# Altium PCB EFR32xG22_ESL-Node_Ref-Des.PcbDoc (part 2 of 3)
Units mm, origin at the board's own origin, x right, y up, seen from the top; angles counter-clockwise.
Board outline 101.83 x 52.07 mm, 2 copper layers (Top, Bottom), stack 0.78 mm thick; 179 components, 91 nets, 473 pads, 1291 vias.
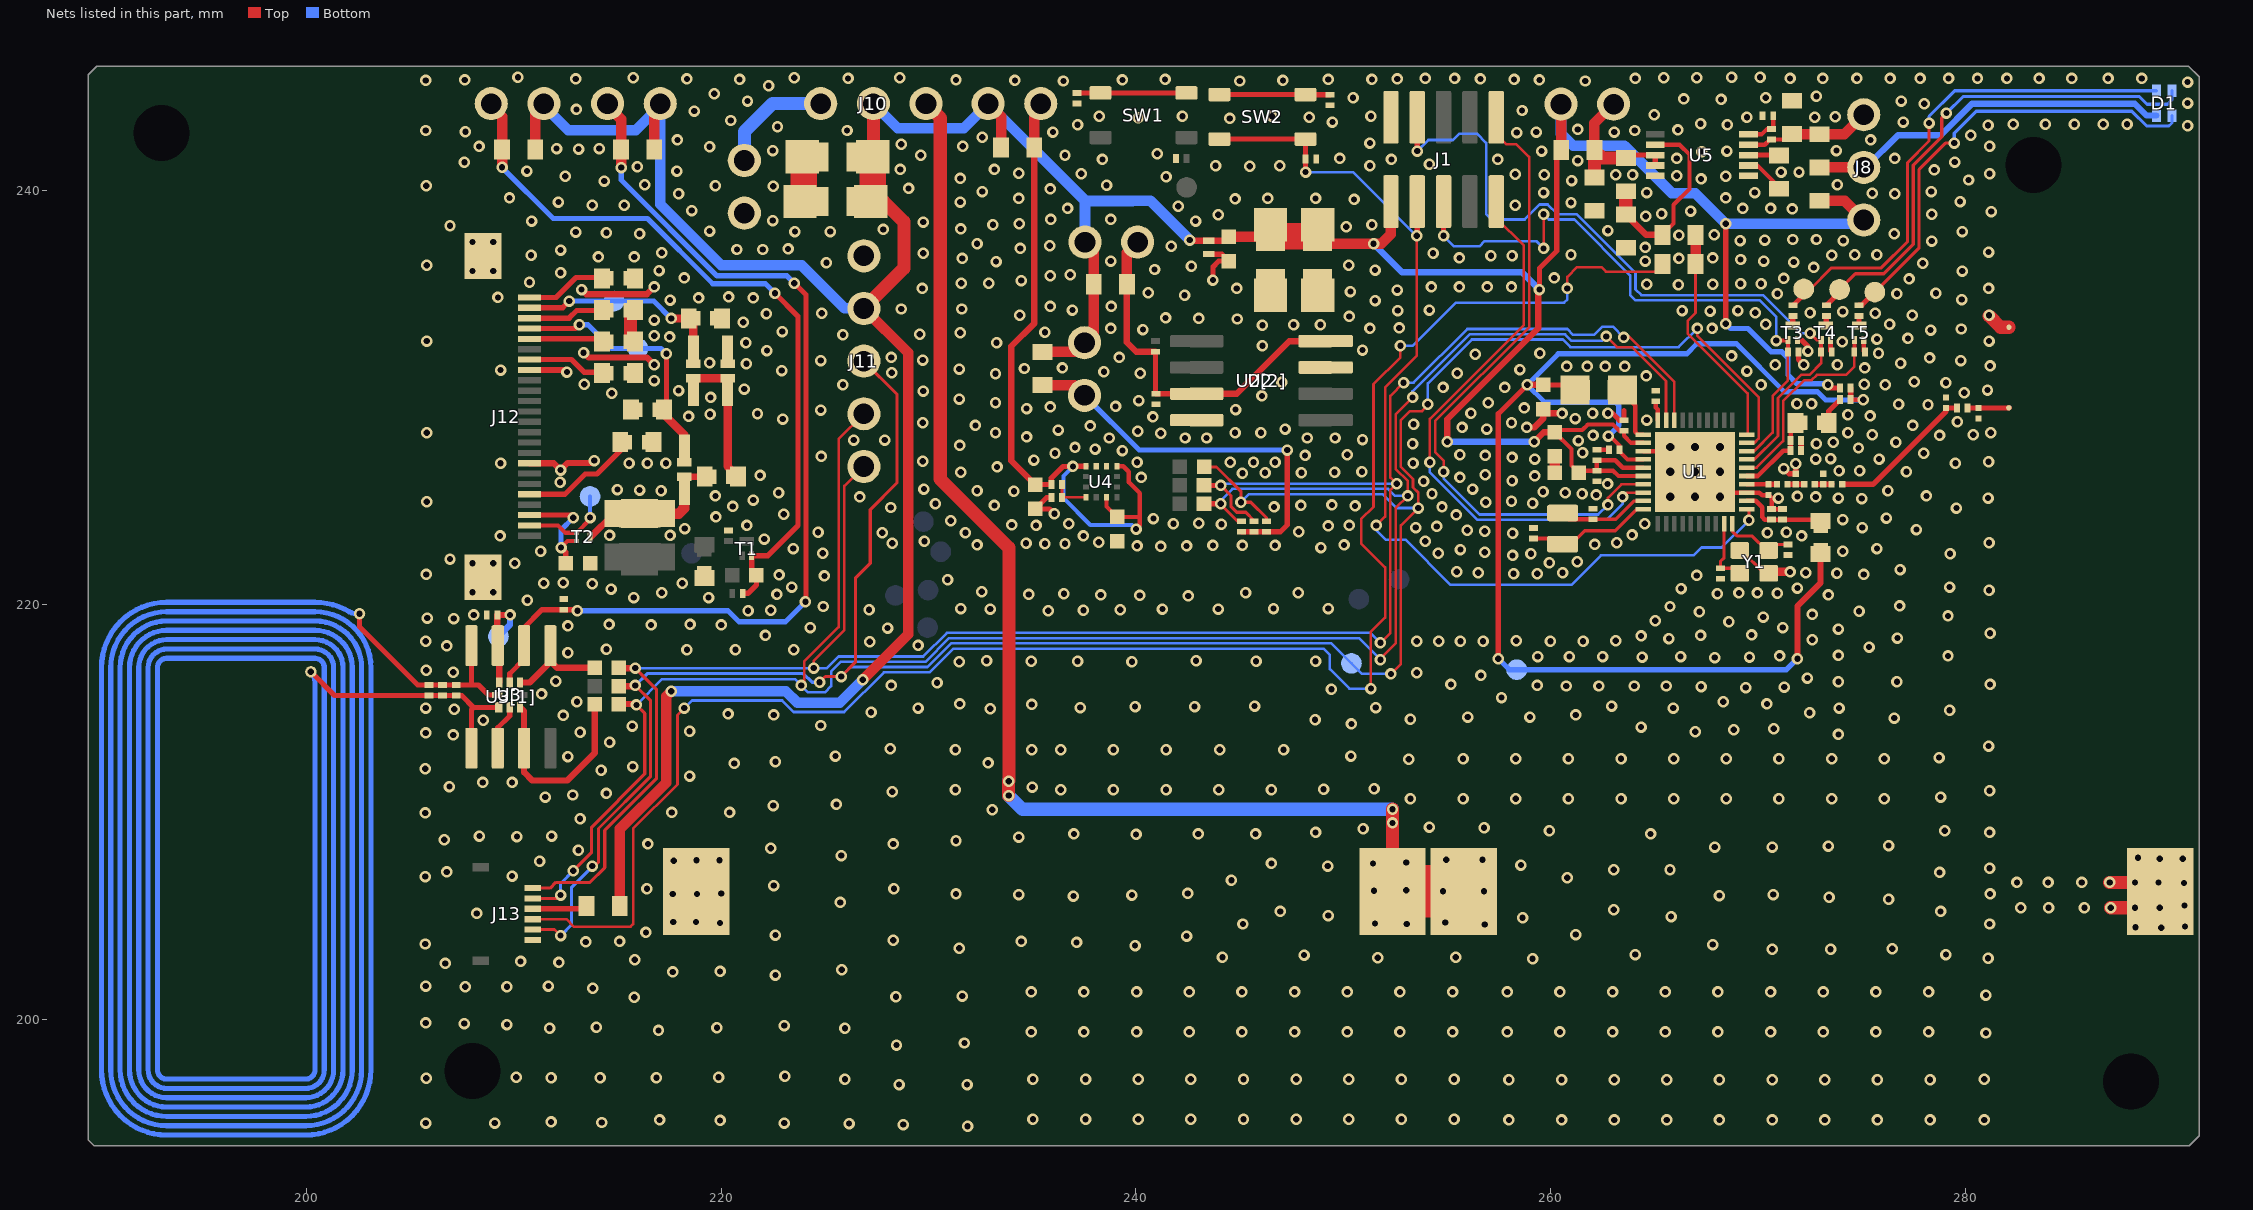
[diagram p2: the nets of this part, all layers, seen from the top]

## Via types
v1: diameter 0.554/0.554 (per signal layer), hole 0.3, Top to Bottom, tented both sides, 1282 vias
v2: diameter 0.65, hole 0.4, Top to Bottom, 9 vias

## Nets (pads, with @x,y where several pads share a name; then routed paths per layer and width w, separated by ;. In a path a pad name is that pad's centre, name@x,y a point inside that pad or via, vN(x,y) a via of type N, cw(c..) or ccw(c..) an arc to the next point about the centre after c; other vN are vias at no path point) (continued)
GND: "BLE ANT.2" BATT1.2 BATT2.2 C1.2 C2.1 C3.2 C4.1 C5.2 C6.1 C7.1 C8.2 C9.1 C10.1 C11.2 C12.2 C13.2 C14.2 C15.2 C16.2 C17.2 C19.1 C20.2 C21.1 C21[2].1 C22.1 C22[2].1 C23.1 C24.1 C24[2].1 C25.1 C25[2].1 C26.1 C27.1 C28.1 C29.1 C32.1 C33.1 C35.2 C35[2].2 C36.2 C36[2].2 C37.2 C37[2].2 C38.2 C38[2].2 C39.2 C39[2].2 C40.2 C40[2].2 C41.2 C41[2].2 C43.2 C43[2].2 CM1.2 CM2.2 CM3.2 CM4.2 D2.A D5.C D5[2].C J1.2 J7.1 J11.1 J12.8 J12.17 J13.1 LM3.1 R5.2 R6.2 R21.1 R27.1 R28.1 R29.1 R32.1 R38.1 R39.1 R41.2 T3.S T4.S T5.S U1.13 U1.33 U1.EGP U2.4 U2[2].4 U3.2 U3[1].2 U4.8 U4.9 U5.5 U5.6 Y1.2 Y1.4 | length 46.8
  Top w0.127: Y1.4@269.099,222.641 Y1.4@269.179,222.641 ; Y1.2@270.329,221.491 Y1.2@270.549,221.491
  Top w0.152: C40[2].2@215.621,235.737 C40.2@215.837,235.737 ; C41.2@215.633,229.413 C41[2].2@215.848,229.413 ; C35[2].2@216.51,227.838 C35.2@216.725,227.838 ; C43[2].2@219.812,233.807 C43.2@220.028,233.807 ; Y1.4@269.179,222.641 Y1.2@270.329,221.491
  Top w0.203: C3.2@262.23,227.477 C3.2@262.23,227.477 C8.2@262.813,227.476 ; U1.33@264.47,227.407 U1.EGP@265.252,227.407
  Top w0.22: U1.EGP@268.77,225.407 U1.13@269.47,225.407 270.071,225.407 270.205,225.273 270.486,225.273 CM1.2@270.51,225.297 270.662,225.145 C10.1@270.662,224.613 C11.2@271.196,224.613 ; T4.S@273.504,232.771 273.504,232.237 R27.1@273.559,232.181 ; T5.S@275.104,232.771 275.104,232.238 R28.1@275.16,232.181
  Top w0.254: U3[1].2@209.212,213.076 209.212,214.063 209.788,214.64 U3.2@209.788,215.046 ; R32.1@235.918,225.167 235.693,225.167 C26.1@235.145,224.619 235.832,224.619 v1(236.068,224.384) ; U2[2].4@242.465,228.905 U2.4@243.389,228.905 ; D2.A@243.51,236.911 244.139,236.911 C23.1@244.475,236.575 243.992,236.575 243.713,236.296 v1(243.713,235.661) ; v1(262.763,229.235) 262.98,229.235 263.316,228.899 C1.2@263.538,228.899 263.538,229.362 ; v1(271.247,226.568) 271.5,226.315 CM2.2@271.831,226.315 v1(271.831,226.797) ; T3.S@271.907,232.766 272.096,232.766 272.415,232.446 v1(272.415,232.232) ; R29.1@271.959,232.181 271.959,231.825 v1(272.212,231.572) ; C12.2@272.086,227.432 C13.2@272.086,227.914
  Top w0.305: J12.8@210.746,226.823 211.911,226.823 v1(212.242,226.492) 212.59,226.84 213.752,226.84 v1(213.863,226.951) ; J12.17@210.746,231.323 212.446,231.323 v1(212.546,231.223) ; v1(213.258,235.204) 213.487,234.975 216.408,234.975 v1(216.764,235.331) ; v1(213.355,232.158) 213.586,231.927 216.408,231.927 v1(216.764,231.572) ; D5[2].C@220.299,231.626 D5.C@220.299,232.351 ; v1(258.851,228.549) 259.207,228.549 259.639,228.981 C7.1@259.639,229.431 259.841,229.229 v1(260.553,229.229) ; U1.EGP@265.252,227.407 265.452,227.607 v2(265.77,227.607) ; Y1.2@270.549,221.491 Y1.2@270.642,221.583
  Top w0.406: Y1.2@270.642,221.583 v1(271.551,221.583)
  Top w0.508: C4.1@260.197,226.365 C2.1@260.198,227.151
  Top w0.635: C39[2].2@215.621,234.213 215.621,232.905 C38.2@215.837,232.689 ; C21.1@223.977,241.122 C21[2].1@224.46,241.605 ; v1@281.153,233.934 281.703,233.384 282.108,233.384 ; v1(286.969,206.604) v1(288.188,206.604) ; v1(287.02,205.384) v1(288.188,205.384)
  Top w1.27: C21.1@223.977,241.122 223.977,239.827 C22.1@224.358,239.446
  other v1: 231.877,194.843 228.778,194.92 226.162,194.97 205.74,194.996 209.067,194.996 223.037,194.996 214.224,195.021 211.785,195.047 219.939,195.123 217.018,195.148 257.988,195.148 260.528,195.148 263.068,195.148 265.608,195.148 268.148,195.148 270.688,195.148 273.228,195.148 275.768,195.148 278.308,195.148 280.924,195.148 235.026,195.174 237.566,195.174 240.106,195.174 242.646,195.174 245.186,195.174 247.726,195.174 250.266,195.174 252.806,195.174 255.346,195.174 228.575,196.85 231.851,196.85 257.988,197.079 260.528,197.079 263.068,197.079 265.608,197.079 268.148,197.079 270.688,197.079 273.228,197.079 275.768,197.079 278.308,197.079 225.958,197.104 235.026,197.104 237.566,197.104 240.106,197.104 242.646,197.104 245.186,197.104 247.726,197.104 250.266,197.104 252.806,197.104 255.346,197.104 280.924,197.104 205.765,197.155 211.785,197.18 214.147,197.18 216.865,197.18 210.109,197.206 219.862,197.206 223.063,197.256 228.448,198.755 231.724,198.857 281,199.339 234.95,199.39 237.49,199.39 240.03,199.39 242.57,199.39 245.11,199.39 247.65,199.39 250.19,199.39 252.73,199.39 255.27,199.39 257.912,199.39 260.452,199.39 262.992,199.39 265.532,199.39 268.072,199.39 270.612,199.39 273.152,199.39 275.692,199.39 278.232,199.39 216.967,199.466 211.709,199.568 225.958,199.568 219.786,199.593 213.97,199.619 223.037,199.695 209.652,199.746 207.594,199.796 205.74,199.822 215.798,201.066 228.422,201.092 231.623,201.117 281,201.168 234.95,201.32 237.49,201.32 240.03,201.32 242.57,201.32 245.11,201.32 247.65,201.32 250.19,201.32 252.73,201.32 255.27,201.32 257.912,201.32 260.452,201.32 262.992,201.32 265.532,201.32 268.072,201.32 270.612,201.32 273.152,201.32 275.692,201.32 278.232,201.32 213.792,201.498 207.645,201.574 209.652,201.574 205.74,201.6 211.658,201.6 222.606,202.133 217.653,202.286 219.939,202.311 225.806,202.387 206.68,202.692 212.166,202.743 210.312,202.794 215.824,202.87 259.131,202.921 281.102,202.946 251.663,202.971 244.17,202.997 255.422,202.997 248.107,203.098 264.084,203.124 279.07,203.124 270.688,203.378 273.507,203.378 276.479,203.403 231.47,203.429 239.954,203.556 267.818,203.606 205.715,203.632 237.134,203.708 213.462,203.733 215.087,203.759 234.467,203.759 228.295,203.81 242.443,204.013 222.606,204.064 261.214,204.089 216.357,204.191 289.458,204.419 288.214,204.445 290.601,204.47 245.161,204.597 281.178,204.597 219.939,204.648 217.678,204.699 218.77,204.699 258.648,204.902 265.811,204.953 249.276,205.003 208.204,205.105 246.964,205.207 278.816,205.207 263.042,205.283 282.677,205.384 284.023,205.384 285.75,205.384 289.382,205.384 290.576,205.486 225.73,205.638 276.301,205.791 273.431,205.892 236.982,205.943 268.148,205.969 239.801,205.994 234.34,206.019 270.739,206.019 217.653,206.045 218.821,206.045 231.318,206.045 281.203,206.045 219.989,206.07 242.494,206.07 216.408,206.299 228.321,206.299 222.529,206.451 290.551,206.578 282.499,206.604 283.997,206.604 285.623,206.604 289.331,206.604 244.602,206.705 260.807,206.832 205.715,206.883 209.906,206.908 278.765,207.086 206.756,207.112 263.042,207.213 265.76,207.213 281.178,207.289 249.25,207.391 258.572,207.442 246.532,207.518 211.226,207.62 217.703,207.645 218.796,207.67 219.913,207.67 289.382,207.747 290.5,207.747 288.341,207.797 225.781,207.899 213.106,208.153 222.377,208.255 267.919,208.305 270.688,208.305 273.406,208.356 276.301,208.382 216.459,208.458 228.295,208.458 231.318,208.61 206.629,208.661 234.34,208.788 210.134,208.813 208.331,208.839 211.811,208.839 240.005,208.915 237.007,208.94 243.002,208.94 245.77,208.94 264.82,208.94 248.666,209.017 281.178,209.017 259.944,209.093 279.019,209.093 250.952,209.194 256.794,209.245 254.152,209.271 213.182,209.677 205.715,209.956 217.602,209.982 220.396,209.982 233.07,210.109 222.504,210.312 225.552,210.363 253.238,210.642 255.778,210.642 258.318,210.642 260.858,210.642 263.398,210.642 265.938,210.642 268.478,210.642 271.018,210.642 273.558,210.642 276.098,210.642 211.506,210.718 278.816,210.718 212.827,210.82 214.452,210.896 228.244,210.972 281.178,211.023 231.292,211.074 236.372,211.074 238.912,211.074 241.452,211.074 243.992,211.074 246.532,211.074 249.047,211.099 251.485,211.125 235.001,211.201 206.883,211.226 208.483,211.43 209.906,211.43 218.465,211.734 214.198,212.014 205.715,212.09 215.722,212.192 220.624,212.344 232.867,212.369 222.606,212.42 253.162,212.547 255.778,212.573 258.318,212.573 260.858,212.573 263.398,212.573 265.938,212.573 268.478,212.573 271.018,212.573 273.558,212.573 276.098,212.573 278.74,212.623 212.598,212.674 225.501,212.7 250.368,212.7 231.292,213.004 234.975,213.004 236.372,213.004 238.912,213.004 241.452,213.004 244.043,213.004 247.117,213.004 228.143,213.055 281.127,213.182 214.605,213.36 207.061,213.716 273.888,213.741 205.74,213.817 213.182,213.843 266.979,213.868 218.465,213.893 268.834,213.97 270.764,214.02 264.363,214.097 215.697,214.147 224.79,214.173 250.393,214.249 208.509,214.427 248.641,214.452 253.238,214.478 276.581,214.528 256.007,214.579 259.004,214.579 212.369,214.655 222.529,214.681 261.214,214.681 220.32,214.732 272.491,214.782 227.219,214.807 279.248,214.909 207.112,214.96 232.969,214.986 205.74,215.011 229.489,215.011 265.913,215.011 273.914,215.011 237.312,215.036 251.562,215.036 239.954,215.087 242.824,215.087 245.72,215.113 262.941,215.113 234.975,215.189 231.496,215.214 270.434,215.214 213.03,215.316 268.326,215.316 257.632,215.519 211.328,215.697 249.428,215.925 269.418,216.002 271.272,216.027 267.259,216.052 260.756,216.078 262.331,216.078 264.033,216.078 265.582,216.078 228.194,216.103 259.359,216.103 255.194,216.154 281.203,216.154 230.403,216.23 273.888,216.281 276.708,216.281 212.014,216.306 272.39,216.459 256.642,216.586 253.543,216.713 207.061,216.738 205.765,216.84 231.47,217.246 239.801,217.246 234.95,217.272 237.185,217.272 245.796,217.272 248.666,217.272 232.791,217.297 242.9,217.297 267.919,217.449 264.414,217.475 269.596,217.475 259.385,217.5 260.909,217.5 262.509,217.5 266.268,217.5 271.043,217.526 279.171,217.526 273.888,217.551 212.598,217.678 218.338,217.83 220.675,217.83 223.495,217.83 214.452,217.856 275.361,217.957 206.756,218.008 229.489,218.034 227.152,218.211 205.74,218.237 253.543,218.237 254.61,218.237 255.651,218.237 256.743,218.237 259.994,218.237 261.569,218.237 258.343,218.262 263.144,218.262 272.618,218.313 265.709,218.364 276.733,218.389 264.363,218.491 222.123,218.516 267.233,218.516 269.697,218.542 281.203,218.618 273.888,218.821 228.016,218.872 224.282,218.897 271.196,218.897 212.598,218.973 216.611,219.024 219.989,219.024 214.579,219.05 218.491,219.05 268.605,219.177 265.049,219.227 207.086,219.329 205.816,219.354 270.256,219.405 279.171,219.456 208.051,219.507 272.618,219.532 267.183,219.659 274.879,219.685 221.285,219.71 235.763,219.71 222.377,219.735 237.465,219.735 227.127,219.761 239.243,219.761 232.969,219.786 241.275,219.786 243.967,219.786 231.546,219.812 246.634,219.812 249.276,219.812 224.917,219.913 265.76,219.913 276.835,219.939 210.642,220.218 215.773,220.345 219.38,220.345 242.519,220.421 240.182,220.447 238.303,220.472 273.406,220.472 222.682,220.497 234.823,220.497 236.525,220.523 268.046,220.523 270.942,220.548 217.119,220.574 245.288,220.574 247.828,220.574 269.088,220.567 269.977,220.567 232.562,220.624 281.153,220.701 214.681,220.751 266.294,220.777 271.907,220.802 223.393,220.853 279.248,220.853 213.766,221.005 211.43,221.031 218.11,221.031 212.369,221.056 230.911,221.209 224.968,221.386 267.056,221.412 222.783,221.437 205.765,221.463 275.107,221.463 258.216,221.488 259.359,221.488 273.812,221.513 256.515,221.539 260.579,221.539 272.313,221.539 255.473,221.59 276.86,221.691 210.033,221.996 259.944,222.021 261.29,222.072 206.908,222.199 258.166,222.377 259.055,222.453 279.273,222.453 224.892,222.479 254.584,222.479 256.819,222.529 211.277,222.58 274.091,222.58 255.651,222.656 223.469,222.707 275.742,222.707 248.92,222.758 241.198,222.809 240.055,222.834 242.443,222.834 243.713,222.86 245.135,222.86 246.71,222.86 232.334,222.885 250.038,222.885 262.128,222.91 235.61,222.936 236.576,222.936 228.244,222.961 234.696,222.961 263.195,222.987 281.153,222.987 238.201,223.012 229.794,223.063 253.949,223.063 222.072,223.164 209.321,223.317 237.465,223.317 272.11,223.317 214.605,223.342 217.526,223.342 263.931,223.368 258.166,223.444 227.762,223.469 231.775,223.469 270.459,223.469 224.663,223.495 271.374,223.495 247.853,223.52 256.819,223.545 255.981,223.596 277.647,223.622 218.237,223.672 253.492,223.723 275.031,223.723 254.508,223.774 249.276,223.799 221.234,223.825 235.179,223.825 250.292,223.825 234.01,223.85 244.119,223.876 236.753,223.901 241.808,223.901 264.541,223.901 243.027,223.926 231.064,224.053 274.091,224.104 240.843,224.155 276.2,224.18 219.735,224.231 255.448,224.333 223.012,224.358 279.578,224.663 228.168,224.688 246.659,224.714 254.762,224.714 220.548,224.739 250.571,224.765 233.172,224.79 247.955,224.79 249.453,224.815 230.327,224.866 259.131,224.892 256.87,224.942 205.791,224.968 258.115,224.993 221.539,225.044 275.006,225.12 270.993,225.146 273.888,225.146 281.102,225.146 226.67,225.196 272.796,225.196 271.907,225.222 219.71,225.247 278.13,225.247 262.204,225.298 254.279,225.349 261.518,225.349 222.758,225.4 260.706,225.4 259.639,225.45 234.112,225.476 217.094,225.501 232.334,225.501 276.276,225.501 216.052,225.527 214.986,225.552 229.768,225.577 256.235,225.577 262.75,225.824 212.217,225.908 253.873,225.958 258.14,225.984 240.259,226.136 255.626,226.136 259.232,226.212 221.869,226.238 256.845,226.263 245.135,226.339 246.228,226.365 247.98,226.365 231.546,226.39 249.58,226.39 250.901,226.416 277.165,226.416 273.914,226.466 274.904,226.466 233.299,226.644 209.347,226.822 215.544,226.822 216.433,226.822 217.322,226.822 253.365,226.822 279.527,226.822 240.055,226.873 244.551,226.873 245.669,226.873 246.71,226.873 281.127,226.898 229.718,226.924 235.077,226.974 259.232,227.025 272.796,227.025 275.844,227.025 273.507,227.051 258.14,227.101 224.815,227.152 248.158,227.203 256.845,227.203 250.19,227.228 255.626,227.228 236.093,227.305 278.003,227.305 261.544,227.33 239.344,227.432 238.023,227.508 274.853,227.559 237.058,227.584 231.496,227.686 253.34,227.762 272.821,227.762 273.634,227.838 276.657,227.838 261.341,227.914 226.383,227.94 227.881,227.94 250.927,227.965 238.709,228.041 242.367,228.041 243.408,228.041 248.26,228.041 249.606,228.041 234.721,228.092 262.052,228.168 278.765,228.168 275.514,228.194 280.391,228.194 241.198,228.27 205.791,228.295 233.223,228.295 244.78,228.295 246.024,228.295 274.345,228.295 281.229,228.295 240.081,228.371 236.245,228.422 247.193,228.473 256.921,228.473 255.727,228.549 237.795,228.625 232.258,228.651 277.47,228.651 253.39,228.702 229.718,228.778 258.115,228.778 279.629,228.829 264.643,228.905 222.961,228.956 261.188,228.981 240.817,229.057 218.415,229.083 275.412,229.108 274.345,229.159 219.456,229.184 221.742,229.21 256.159,229.235 262.026,229.235 224.79,229.387 244.805,229.413 234.721,229.464 258.724,229.489 235.864,229.54 239.014,229.565 278.206,229.641 276.784,229.667 271.882,229.692 272.593,229.692 233.223,229.743 256.997,229.743 240.132,229.845 231.47,229.921 219.481,229.997 246.075,230.073 214.706,230.2 279.959,230.226 229.743,230.302 217.932,230.327 281.076,230.353 221.107,230.403 254.813,230.48 257.785,230.48 225.862,230.609 270.154,230.607 276.149,230.607 213.385,230.632 275.133,230.632 279.07,230.708 247.04,230.734 277.546,230.759 216.764,230.81 264.617,231.038 233.223,231.14 240.208,231.165 255.499,231.165 228.219,231.191 238.455,231.242 269.469,231.267 222.91,231.292 209.347,231.318 258.521,231.343 231.47,231.369 234.62,231.394 236.449,231.419 275.158,231.419 260.782,231.496 261.772,231.496 262.636,231.496 263.576,231.496 281.203,231.521 270.84,231.572 273.837,231.572 221.209,231.623 276.885,231.648 219.431,231.673 224.79,231.775 279.781,231.775 229.718,231.8 278.282,231.902 228.194,231.927 239.192,231.927 268.732,232.004 256.362,232.08 259.486,232.131 275.819,232.131 222.199,232.258 250.927,232.283 246.101,232.486 221.183,232.639 233.274,232.639 274.066,232.689 205.791,232.715 281.153,232.715 275.742,232.816 277.241,232.842 217.5,232.918 216.764,232.969 225.862,233.02 229.565,233.045 231.521,233.121 235.61,233.147 222.936,233.172 278.333,233.248 240.335,233.274 279.806,233.299 238.785,233.324 251.282,233.324 267.792,233.324 252.705,233.35 246.101,233.477 247.599,233.502 248.895,233.502 270.383,233.528 276.352,233.528 221.056,233.629 216.764,233.731 244.881,233.782 243.027,233.807 241.427,233.832 250.292,233.909 234.391,233.959 277.444,233.959 281.153,233.959 222.174,234.036 224.841,234.061 275.666,234.061 269.875,234.086 272.517,234.086 274.091,234.137 267.691,234.163 252.628,234.188 266.344,234.188 269.037,234.188 236.931,234.213 254.152,234.213 228.676,234.264 231.597,234.264 235.864,234.391 238.811,234.391 251.536,234.671 217.526,234.696 279.832,234.721 218.897,234.798 221.539,234.798 209.22,234.823 220.345,234.848 242.341,234.925 270.942,235.001 276.708,235.001 278.587,235.026 240.589,235.052 250.342,235.102 252.603,235.179 229.692,235.255 244.856,235.255 281.127,235.255 254.254,235.331 255.6,235.331 256.946,235.331 258.115,235.331 266.167,235.433 264.643,235.458 267.818,235.458 269.164,235.483 270.154,235.483 231.572,235.509 232.893,235.509 210.744,235.56 234.467,235.636 277.292,235.712 271.247,235.737 218.211,235.763 260.172,235.763 235.864,235.864 236.83,235.915 212.242,236.017 279.857,236.093 216.992,236.118 251.536,236.144 240.894,236.169 272.694,236.271 242.672,236.322 205.791,236.372 250.266,236.372 277.952,236.474 225.069,236.499 271.729,236.525 233.248,236.55 238.785,236.576 264.566,236.576 270.281,236.576 269.164,236.652 231.623,236.703 266.192,236.703 255.6,236.728 267.818,236.728 214.071,236.779 215.798,236.779 257.124,236.83 258.14,236.83 210.82,236.855 273.558,236.855 260.985,236.88 274.676,236.88 275.742,236.88 229.743,236.957 254.33,236.957 217.119,236.982 281.127,237.007 212.242,237.109 220.751,237.134 221.996,237.134 223.215,237.16 234.417,237.185 264.566,237.236 241.706,237.287 235.839,237.312 232.334,237.414 278.384,237.541 269.138,237.566 274.117,237.566 270.332,237.592 271.678,237.617 272.821,237.617 266.192,237.82 267.894,237.846 216.052,237.896 276.581,237.896 214.452,237.947 212.979,237.973 223.545,237.998 225.247,237.998 279.857,237.998 219.431,238.023 262.763,238.049 227.805,238.1 231.546,238.125 250.139,238.227 206.908,238.277 233.096,238.328 251.384,238.328 234.366,238.379 229.743,238.455 210.845,238.506 242.875,238.506 222.479,238.531 235.89,238.582 238.785,238.582 264.592,238.735 243.967,238.811 278.384,238.836 265.354,238.862 281.254,238.963 266.751,238.989 218.567,239.014 271.653,239.09 236.703,239.116 269.265,239.116 270.612,239.116 242.037,239.217 213.766,239.268 215.316,239.268 258.293,239.268 260.985,239.395 212.141,239.42 231.521,239.42 279.756,239.446 250.52,239.547 244.78,239.573 234.34,239.598 246.355,239.598 248.666,239.598 209.779,239.624 268.453,239.624 217.932,239.827 276.606,239.827 275.514,239.852 259.664,239.878 264.643,239.878 269.85,239.878 232.588,239.928 278.359,239.928 235.864,240.055 229.032,240.081 222.504,240.182 205.765,240.208 219.71,240.208 238.582,240.233 216.306,240.259 273.837,240.259 214.351,240.436 261.01,240.462 280.162,240.487 267.259,240.538 231.521,240.563 241.452,240.64 212.471,240.665 268.453,240.665 266.09,240.69 259.69,240.741 263.144,240.741 263.957,240.741 258.293,240.767 237.363,240.792 281.178,240.792 234.34,240.817 271.12,240.868 271.983,240.868 210.617,240.919 217.856,240.919 278.511,240.97 228.625,240.995 233.172,240.995 215.951,241.122 245.491,241.148 243.84,241.173 246.939,241.173 251.282,241.173 254.152,241.249 207.602,241.343 279.502,241.351 261.315,241.427 238.379,241.478 252.324,241.478 257.454,241.478 249.834,241.529 266.09,241.529 276.606,241.529 229.616,241.681 236.576,241.681 241.021,241.757 267.284,241.859 259.563,241.884 268.503,241.884 222.479,241.91 273.787,241.91 213.114,241.978 212.047,242.004 214.104,242.004 219.431,242.087 208.313,242.105 231.648,242.113 281.178,242.113 228.676,242.214 251.282,242.265 217.881,242.418 275.438,242.418 232.588,242.545 280.264,242.646 258.369,242.773 235.991,242.799 259.309,242.799 263.068,242.799 207.653,242.816 205.74,242.875 226.06,242.875 264.056,242.875 266.141,242.9 261.315,242.926 222.707,243.053 290.728,243.103 281.102,243.129 237.185,243.154 268.529,243.154 282.321,243.18 283.87,243.18 285.267,243.18 286.664,243.18 287.807,243.18 267.233,243.205 249.479,243.281 277.012,243.281 220.447,243.357 244.526,243.459 240.106,243.484 248.361,243.51 269.469,243.51 272.745,243.51 273.736,243.535 238.227,243.561 242.24,243.561 246.558,243.561 251.333,243.561 264.998,243.637 218.694,243.815 258.623,243.84 213.004,243.891 278.028,244.17 290.728,244.196 221.259,244.297 276.911,244.297 268.224,244.373 266.421,244.399 250.469,244.45 270.383,244.45 272.821,244.526 219.659,244.653 222.275,245.034 290.728,245.212 236.499,245.262 245.008,245.262 261.671,245.262 205.74,245.288 234.163,245.288 247.091,245.288 207.62,245.313 231.318,245.313 239.344,245.313 259.461,245.313 220.878,245.339 241.402,245.339 249.276,245.339 251.384,245.339 258.242,245.339 212.979,245.364 218.338,245.364 252.603,245.364 256.616,245.364 226.111,245.389 253.949,245.389 255.372,245.389 264.084,245.389 271.551,245.389 273.126,245.389 274.777,245.389 276.377,245.389 277.825,245.389 279.197,245.389 280.594,245.389 282.016,245.389 283.566,245.389 285.14,245.389 286.893,245.389 288.519,245.389 215.748,245.415 223.52,245.415 228.6,245.415 265.455,245.415 267.056,245.415 210.185,245.44 268.732,245.44 270.104,245.44
  other v2: 265.77,225.207 266.97,225.207 268.17,225.207 265.77,226.407 266.97,226.407 268.17,226.407 266.97,227.607 268.17,227.607
I2C_SCL: J11.4 J13.5 R11.1 R12.1 R15.1 U1.29 | length 108.4
  Top w0.127: v1(223.85,216.103) 223.992,216.245 223.992,217.261 225.654,218.923 225.654,227.99 J11.4@226.873,229.21 ; v1(251.79,217.348) 251.79,217.399 252.527,218.135 252.527,224.663 v1(253.111,225.247) 253.111,225.959 252.527,226.543 252.527,229.184 v1(253.34,229.997) ; v1(262.687,232.943) 263.205,232.425 263.935,232.425 265.57,230.79 U1.29@265.57,228.907
  Top w0.152: J13.5@210.899,205.83 212.078,205.83 v1(212.242,205.994) ; v1(212.852,207.162) 213.741,208.051 213.741,209.271 216.306,211.836 216.306,214.757 v1(215.9,215.163) ; v1(244.094,224.866) 244.094,224.833 244.898,224.029 R15.1@245.085,224.029
  Top w0.254: R11.1@243.281,224.866 v1(244.094,224.866)
  Top w0.305: R12.1@215.055,215.206 215.857,215.206 v1(215.9,215.163)
  Bottom w0.127: v1(215.9,215.163) 217.145,216.408 223.545,216.408 v1(223.85,216.103) 224.18,215.773 224.994,215.773 225.298,216.077 225.298,216.789 225.755,217.246 229.837,217.246 230.98,218.389 250.749,218.389 v1(251.79,217.348) ; v1(244.094,224.866) 244.094,225.027 244.653,225.585 252.162,225.585 252.501,225.247 v1(253.111,225.247) ; v1(253.34,229.997) 253.34,230.292 256.093,233.045 260.706,233.045 261.021,232.73 262.473,232.73 v1(262.687,232.943)
  Bottom w0.152: v1(212.242,205.994) 212.242,206.553 v1(212.852,207.162)
I2C_SDA: J11.5 J13.6 R9.1 R10.1 R14.1 U1.28 | length 106
  Top w0.127: v1(224.46,216.941) 224.46,217.297 225.933,218.77 225.933,225.73 J11.5@226.873,226.67 ; v1(251.79,218.161) 252.273,218.643 252.273,225.527 v1(252.578,225.831) 252.273,226.136 252.273,230.073 v1(252.908,230.708) ; v1(263.525,232.893) 263.725,232.893 263.776,232.943 265.97,230.749 U1.28@265.97,228.907
  Top w0.152: J13.6@210.899,206.33 211.74,206.33 212.014,206.604 213.665,206.604 214.376,207.315 214.376,209.115 216.865,211.605 216.865,215.925 v1(215.849,216.941) ; v1(244.094,225.755) 244.579,225.27 244.579,224.744 244.86,224.462 245.294,224.462 245.694,224.062 R14.1@245.694,224.029
  Top w0.254: R10.1@243.281,225.755 v1(244.094,225.755)
  Top w0.305: R9.1@215.055,216.959 215.072,216.941 v1(215.849,216.941)
  Bottom w0.127: v1(215.849,216.941) v1(224.46,216.941) 225.091,216.941 225.65,217.5 229.732,217.5 230.875,218.643 251.308,218.643 v1(251.79,218.161) ; v1(244.094,225.755) 244.178,225.839 252.57,225.839 v1(252.578,225.831) ; v1(252.908,230.708) 253.397,230.708 255.988,233.299 260.811,233.299 261.09,233.02 262.102,233.02 262.493,233.411 263.007,233.411 v1(263.525,232.893)
LED_B: R28.2 T5.G U1.16 | length 9.6
  Top w0.127: U1.16@269.47,226.607 269.939,226.607 271.221,227.889 271.221,229.819 272.237,230.835 272.596,230.835 272.85,231.089 274.244,231.089 274.65,231.496 R28.2@274.65,232.181
  Top w0.203: R28.2@274.65,232.181 274.654,232.185 T5.G@274.654,232.771
LED_BST_EN: R3.1 R37.1 R38.2 U5.2 | length 9.5
  Top w0.203: U5.2@265.049,242.189 266.221,242.189 266.7,241.71 266.7,240.055 265.936,239.291 265.936,238.389 R3.1@265.392,237.846
  Top w0.305: R38.2@263.627,238.823 264.604,237.846 R3.1@265.392,237.846
  Top w0.635: R38.2@263.627,238.823 R37.1@263.627,239.941
LED_G_DBG_UART_RX: J1.4 R27.2 T4.G U1.17 | length 36.3
  Top w0.127: U1.17@269.47,227.007 269.825,227.007 270.967,228.149 270.967,229.968 272.088,231.089 272.491,231.089 273.049,231.647 R27.2@273.049,232.181
  Top w0.152: v1(272.517,233.096) 272.841,232.771 T4.G@273.054,232.771
  Top w0.203: R27.2@273.049,232.181 273.049,232.767 T4.G@273.054,232.771
  Top w0.254: v1(253.568,241.884) J1.4@253.568,243.513
  Bottom w0.127: v1(253.568,241.884) 254.102,242.418 255.295,242.418 255.6,242.722 256.442,242.722 256.896,242.269 256.896,238.836 257.15,238.582 258.749,238.582 259.47,239.304 259.858,239.304 260.325,238.836 261.253,238.836 264.094,235.996 264.094,235.215 264.374,234.935 270.246,234.935 272.085,233.096 v1(272.517,233.096)
LED_R_DBG_UART_TX: J1.5 R29.2 T3.G U1.18 | length 30.5
  Top w0.127: v1(259.664,237.185) v1(259.664,238.836) ; U1.18@269.47,227.407 269.825,227.407 270.713,228.295 270.713,230.073 271.449,230.809 R29.2@271.449,232.181
  Top w0.203: v1(270.891,232.74) 271.432,232.74 T3.G@271.449,232.757 ; R29.2@271.449,232.181 T3.G@271.449,232.757 ; T3.G@271.457,232.766 T3.G@271.449,232.757
  Top w0.254: v1(254.838,237.795) J1.5@254.838,239.443
  Bottom w0.127: v1(254.838,237.795) 255.346,237.287 256.562,237.287 256.816,237.541 259.309,237.541 v1(259.664,237.185) ; v1(259.664,238.836) 259.918,238.582 261.148,238.582 263.84,235.89 263.84,234.94 264.099,234.681 270.093,234.681 270.891,233.883 v1(270.891,232.74)
NC1: J12.P$5
  other v1: 208,236.1 209,236.1 208,237.5 209,237.5
NC2: J12.P$6
  other v1: 208,220.6 209,220.6 208,222 209,222
"NetBLE ANT_1": "BLE ANT.1" LM3.2 RM1.2 | length 2
  Top w0.254: RM1.2@280.113,229.489 LM3.2@280.645,229.49 LM3.2@280.645,229.49 282.098,229.49 282.105,229.498 ; 282.115,229.49 282.133,229.508
NetC9_2: C9.2 U1.30 | length 0.9
  Top w0.203: C9.2@265.074,229.812 265.074,229.508 265.17,229.412 U1.30@265.17,228.907
NetC10_2: C10.2 C11.1 L2.2 L2[1].2 U1.12 | length 4.3
  Top w0.22: U1.12@269.47,225.007 269.89,225.007 270.205,224.692 270.205,224.231 270.333,224.103 C10.2@270.662,224.103 C11.1@271.196,224.103 272.962,224.103 L2.2@273.025,224.041 ; L2[1].2@272.972,223.748 L2[1].2@273.025,223.8
NetC12_1: C12.1 C13.1 L3.2 L3[2].2 U1.15 | length 4.1
  Top w0.22: U1.15@269.47,226.207 269.997,226.207 271.221,227.432 C12.1@271.576,227.432 C13.1@271.576,227.914 271.576,228.529 L3[2].2@271.818,228.771
  Top w0.254: L3[2].2@271.818,228.771 L3.2@271.856,228.771
NetC14_1: C14.1 U1.9 Y1.1 | length 3.4
  Top w0.152: C14.1@268.249,221.761 268.732,221.761 Y1.1@268.77,221.723 ; C14.1@268.249,221.762 C14.1@268.199,221.762 268.199,222.092 268.37,222.264 U1.9@268.37,223.907 ; Y1.1@268.931,221.736 268.783,221.736 Y1.1@268.77,221.723 ; Y1.1@269.099,221.491 269.002,221.491 Y1.1@268.77,221.723
NetC15_1: C15.1 U1.10 Y1.3 | length 3.5
  Top w0.152: U1.10@268.77,223.907 268.77,223.551 269.011,223.31 269.727,223.31 270.397,222.641 270.625,222.641 270.889,222.905 C15.1@271.45,222.905
NetC16_1: C16.1 U1.39 Y2.1 | length 4.4
  Top w0.152: C16.1@262.052,224.122 262.053,224.123 263.144,224.123 264.028,225.007 U1.39@264.47,225.007
  Top w0.203: Y2.1@260.579,224.422 260.879,224.122 C16.1@262.052,224.122
NetC17_1: C17.1 U1.40 Y2.2 | length 6.4
  Top w0.152: Y2.2@260.579,222.922 260.997,222.922 261.645,223.571 263.119,223.571 264.155,224.607 U1.40@264.47,224.607 U1.40@264.187,224.607
  Top w0.203: C17.1@259.182,223.189 260.312,223.189 Y2.2@260.579,222.922
NetC18_1: C18.1 J3.2 R19.1 R20.2 T1.S | length 35.7
  Top w0.254: R20.2@221.032,220.548 221.285,220.548 221.692,220.955 C18.1@221.692,221.412 221.459,221.645 T1.S@221.459,222.357 222.23,222.357 223.698,223.825 223.698,233.909 v1(222.58,235.026)
  Top w0.508: J3.2@208.897,244.061 209.418,243.54 R19.1@209.418,241.953 209.418,241.102 v1(209.423,241.097)
  Bottom w0.254: v1(209.423,241.097) 211.887,238.633 216.433,238.633 219.583,235.483 222.123,235.483 v1(222.58,235.026)
NetC26_2: C26.2 C27.2 J5.2 R30.1 R31.1 U4.3 U4.7 U4.10 | length 34.3
  Top w0.203: U4.3@238.582,225.179 238.582,224.74 C27.2@239.09,224.232 240.179,224.232 ; U4.7@239.082,226.679 239.386,226.679 239.649,226.416 239.649,225.911 240.18,225.38 240.18,224.231 240.18,223.822 v1(240.005,223.647)
  Top w0.254: C26.2@235.145,225.789 235.158,225.802 R31.1@235.918,225.802 235.918,226.114 236.474,226.67 v1(236.957,226.67) 236.966,226.679 U4.10@237.582,226.679
  Top w0.305: R30.1@235.09,242.062 235.09,233.566 233.985,232.461 233.985,226.95 C26.2@235.145,225.789
  Top w0.508: R30.1@235.09,242.062 235.09,243.853 J5.2@235.407,244.17
  Bottom w0.203: v1(236.957,226.67) 236.502,226.215 236.502,225.144 237.796,223.85 239.801,223.85 v1(240.005,223.647)
NetC28_2: C28.2 J4.1 R33.1 U3.6 U3[1].6 | length 47.4
  Top w0.254: U3.6@209.788,216.246 209.788,216.672 210.482,217.365 U3[1].6@210.482,218.026 210.482,218.889 211.352,219.76 C28.2@212.395,219.76 213.005,219.76 v1(213.055,219.71) ; v1(223.52,235.509) 224.079,234.95 224.079,220.167 v1(224.053,220.142)
  Top w0.508: J4.1@214.511,244.061 215.158,243.413 R33.1@215.158,241.953 215.171,241.94 v1(215.171,241.089)
  Bottom w0.254: v1(213.055,219.71) 220.32,219.71 220.851,219.179 223.091,219.179 v1(224.053,220.142) ; v1@215.186,241.074 v1(215.171,241.089) 215.171,240.482 219.788,235.864 223.164,235.864 v1(223.52,235.509)
NetC29_2: C29.2 TP8.P$1 U3.7 U3[1].7 | length 5.2
  Top w0.305: U3.7@209.288,216.246 209.288,217.95 U3[1].7@209.212,218.026 209.194,218.043 C29.2@209.194,219.507 v1(209.804,219.507)
  Bottom w0.305: TP8.P$1@209.245,218.465 209.804,219.024 v1(209.804,219.507)
NetC30_1: "NFC ANT.PB" C30.1 C31.1 R34.1 U3.8 U3[1].8 | length 10.5
  Top w0.25: C31.1@205.889,216.127 C30.1@206.55,216.127 R34.1@207.21,216.127 207.975,216.127 ; U3[1].8@207.942,218.026 207.942,216.16 207.975,216.127 ; U3.8@209.188,215.646 208.763,215.646 208.282,216.127 207.975,216.127
  Top w0.254: 202.546,219.564 202.546,218.935 205.355,216.127 C31.1@205.889,216.127
NetC30_2: "NFC ANT.PA" C30.2 C31.2 R34.2 U3.1 U3[1].1 | length 11.8
  Top w0.25: 200.196,216.764 201.344,215.617 C31.2@205.889,215.617 C30.2@206.55,215.617 R34.2@207.21,215.617 207.471,215.617 208.042,215.046 ; U3[1].1@207.942,213.076 207.942,214.946 208.042,215.046 ; U3.1@209.253,215.046 208.042,215.046
NetC32_2: C32.2 J6.2 R36.1 R37.2 U5.3 U5.4 | length 7.6
  Top w0.254: R37.2@263.627,241.541 263.774,241.689 U5.3@265.049,241.689 U5.4@265.049,241.189
  Top w0.508: R36.1@262.115,241.935 262.115,243.218 J6.2@263.042,244.145
  Top w0.635: C32.2@262.128,240.601 262.115,240.614 R36.1@262.115,241.935 262.509,241.541 R37.2@263.627,241.541
NetC34_1: C34.1 U5.7 | length 2
  Top w0.203: U5.7@269.549,241.189 269.982,241.189 271.018,240.153 C34.1@271.018,240.068
NetC34_2: C34.2 U5.8 | length 1.5
  Top w0.254: U5.8@269.549,241.689 270.997,241.689 C34.2@271.018,241.668
NetC35[1]_1: C35.1 C35[2].1 J12.5 | length 5.9
  Top w0.254: J12.5@210.746,225.323 212.445,225.323 213.431,226.309 213.994,226.309 215.125,227.44 C35.1@215.125,227.838 C35[2].1@215.34,227.838
NetC37[1]_1: C37.1 C37[2].1 J12.18 | length 4
  Top w0.254: J12.18@210.746,231.823 212.772,231.823 213.378,231.218 214.184,231.218 C37.1@214.236,231.165 C37[2].1@214.451,231.165
NetC38[1]_1: C38.1 C38[2].1 J12.20 | length 3.4
  Top w0.254: J12.20@210.746,232.823 C38.1@214.141,232.823
NetC39[1]_1: C39.1 C39[2].1 J12.22 | length 3.9
  Top w0.254: J12.22@210.746,233.823 212.655,233.823 213.02,234.188 214.211,234.188 C39.1@214.236,234.213 C39[2].1@214.451,234.213
NetC40[1]_1: C40.1 C40[2].1 J12.24 | length 4.2
  Top w0.254: J12.24@210.746,234.823 212.029,234.823 212.994,235.788 214.287,235.788 C40.1@214.236,235.737 C40[2].1@214.451,235.737
NetC41[1]_1: C41.1 C41[2].1 D3.C D3[2].C J12.21 TP10.P$1 | length 12.9
  Top w0.254: J12.21@210.746,233.323 212.968,233.323 v1(213.149,233.504) ; C41.1@217.348,229.565 v1(217.348,232.105)
  Top w0.305: C41[2].1@217.018,229.413 C41.1@217.233,229.413 ; D3[2].C@218.211,226.867 D3.C@218.211,227.592
  Top w0.406: C41.1@217.233,229.375 217.233,229.171 218.211,228.194 D3.C@218.211,227.592
  Bottom w0.254: v1(213.149,233.504) 213.561,233.504 214.704,232.361 TP10.P$1@215.971,232.361 217.092,232.361 v1(217.348,232.105)
NetC42[1]_1: C42.1 C42[2].1 D4.C D4[2].C D5.A D5[2].A | length 7.3
  Top w0.406: D4.C@218.648,230.201 D4[2].C@218.648,230.926 D5[2].A@220.299,230.926 D5.A@220.299,230.201 220.299,226.672 C42.1@220.794,226.176
NetC42[1]_2: C42.2 C42[2].2 D3.A D3[2].A L4.2 L4[2].2 L4[3].2 L4[4].2 T2.D | length 7.6
  Top w0.305: T2.D@213.685,223.266 214.811,224.392 L4[4].2@216.052,224.392 ; D3.A@218.211,225.442 D3[2].A@218.211,226.167 218.22,226.176 C42.2@219.194,226.176
  Top w0.508: L4[4].2@216.052,224.392 217.941,224.392 218.211,224.663 D3.A@218.211,225.442
NetC43[1]_1: C43.1 C43[2].1 D4.A D4[2].A J12.23 TP9.P$1 | length 10.4
  Top w0.254: J12.23@210.746,234.323 212.341,234.322 v1(212.666,234.647)
  Top w0.406: v1(217.576,233.807) C43.1@218.427,233.807 218.648,233.587 D4.A@218.648,232.351 D4[2].A@218.648,231.626
  Bottom w0.254: v1(212.666,234.647) TP9.P$1@214.828,234.647 216.736,234.647 v1(217.576,233.807)
NetCC1_1: CC1.1 CM3.1 LM2.2 | length 0.8
  Top w0.254: LM2.2@272.747,225.806 CM3.1@273.152,225.805 CM3.1@273.152,225.805 CM3.1@273.152,225.805 CC1.1@273.557,225.806
NetCC1_2: CC1.2 CM4.1 RM1.1 | length 7.2
  Top w0.254: CC1.2@274.067,225.806 275.55,225.806 279.07,229.326 CM4.1@279.07,229.488 RM1.1@279.603,229.489 RM1.1@279.603,229.489
NetCM1_1: CM1.1 LM1.1 U1.14 | length 1.4
  Top w0.203: U1.14@269.47,225.807 CM1.1@270.51,225.807
  Top w0.254: CM1.1@270.51,225.807 270.914,225.807 LM1.1@270.915,225.806
NetCM2_1: CM2.1 LM1.2 LM2.1 | length 0.8
  Top w0.254: LM1.2@271.425,225.806 CM2.1@271.831,225.805 CM2.1@271.831,225.805 LM2.1@272.237,225.806 LM2.1@272.237,225.806
NetD1_1: D1.1 R26.2 TP7.P$1 | length 24.9
  Top w0.152: TP7.P$1@272.212,235.229 272.535,235.229 273.551,236.245 275.959,236.245 277.218,237.504 277.218,241.328 278.257,242.367 v1(278.257,243.23)
  Top w0.254: R26.2@271.704,234.443 272.212,234.951 TP7.P$1@272.212,235.229
  Bottom w0.152: v1(278.257,243.23) 278.257,243.554 279.499,244.796 D1.1@289.225,244.796
NetD1_2: D1.2 R24.2 TP5.P$1 | length 24.4
  Top w0.152: TP5.P$1@273.939,235.204 274.701,235.966 276.075,235.966 277.497,237.388 277.497,241.201 278.867,242.57 278.867,243.484 v1(279.095,243.713)
  Top w0.254: R24.2@273.304,234.443 273.939,235.078 TP5.P$1@273.939,235.204
  Bottom w0.152: v1(279.095,243.713) 279.898,244.516 288.401,244.516 288.773,244.145 289.763,244.145 289.975,244.357 D1.2@289.975,244.796
NetD1_3: D1.3 R25.2 TP6.P$1 | length 22.2
  Top w0.152: TP6.P$1@275.641,235.077 277.777,237.213 277.777,240.998 279.044,242.265 v1(279.476,242.265)
  Top w0.254: R25.2@274.879,234.443 275.007,234.443 TP6.P$1@275.641,235.077
  Bottom w0.152: v1(279.476,242.265) 279.476,242.748 280.533,243.805 288.039,243.805 288.751,243.092 289.828,243.092 289.975,243.239 D1.3@289.975,243.596
NetJ9_1: J9.1 R13.2 R14.2 R15.2 R16.1 | length 19.1
  Top w0.254: R15.2@245.085,223.519 R14.2@245.694,223.519 R13.2@246.304,223.519 246.963,223.519 247.294,223.85 v1(247.294,227.457)
  Top w0.508: R16.1@235.483,230.594 237.02,230.594 J9.1@237.515,230.099
  Bottom w0.254: J9.1@237.515,230.099 240.157,227.457 v1(247.294,227.457)
NetJ12_2: J12.2 T2.G TP12.P$1 | length 4.4
  Top w0.203: J12.2@210.746,223.823 212.117,223.823 212.474,223.466 T2.G@213.01,223.466 213.665,224.121 v1(213.665,224.206)
  Bottom w0.203: v1(213.665,224.206) TP12.P$1@213.665,225.222
NetJ12_3: J12.3 R41.1 T2.S | length 5.6
  Top w0.203: v1(212.268,222.758) 212.576,223.066 T2.S@213.01,223.066
  Top w0.254: J12.3@210.746,224.323 212.729,224.323 v1(212.856,224.196) ; v1(212.268,222.758) 212.496,222.53 R41.1@212.496,221.996
  Bottom w0.254: v1(212.268,222.758) 212.268,223.608 v1(212.856,224.196)
NetJ13_4: J13.4 R35.1 | length 2.7
  Top w0.254: J13.4@210.899,205.33 213.369,205.33 R35.1@213.5,205.461
NetL1[1]_1: L1.1 L1[2].1 U1.31 | length 3.1
  Top w0.152: L1[2].1@263.131,230.346 L1.1@263.474,230.346
  Top w0.203: L1.1@263.601,230.346 263.601,230.092 264.084,229.61 264.084,228.34 264.216,228.207 U1.31@264.47,228.207
  Top w0.254: L1.1@263.474,230.346 L1.1@263.601,230.346
NetL3[1]_1: L3.1 L3[2].1 R2.2 | length 1.6
  Top w0.152: L3.1@273.203,228.771 L3[2].1@273.418,228.771
  Top w0.254: L3[2].1@273.418,228.771 273.418,229.344 R2.2@273.963,229.889
NetR3_2: R3.2 R4.1 U1.20 | length 11
  Top w0.127: R4.1@266.992,236.423 266.992,234.074 266.614,233.695 266.614,233.077 269.505,230.186 269.505,228.242 U1.20@269.47,228.207
  Top w0.508: R4.1@266.992,236.423 R3.2@266.992,237.846
NetR5_1: R5.1 SW2.3 SW2.4 | length 5.3
  Top w0.254: SW2.4@244.026,244.61 SW2.3@248.176,244.61 248.183,244.603 R5.1@249.352,244.603
NetR6_1: R6.1 SW1.3 SW1.4 | length 5.3
  Top w0.254: R6.1@237.16,244.68 238.279,244.68 SW1.4@238.285,244.686 SW1.3@242.435,244.686
NetR24_1: R24.1 T4.D | length 0.5
  Top w0.254: T4.D@273.279,233.471 273.304,233.497 R24.1@273.304,233.933
NetR25_1: R25.1 T5.D | length 0.5
  Top w0.254: T5.D@274.879,233.471 R25.1@274.879,233.933
NetR26_1: R26.1 T3.D | length 0.5
  Top w0.254: T3.D@271.682,233.466 271.682,233.911 R26.1@271.704,233.933
NetR31_2: R31.2 R32.2 U4.1 | length 1.8
  Top w0.127: R31.2@236.428,225.802 R32.2@236.428,225.167 236.44,225.179 U4.1@237.582,225.179
NetR39_2: R39.2 R40.1 U5.10 | length 1.9
  Top w0.203: U5.10@269.549,242.689 270.172,242.689 270.435,242.952 R40.1@270.662,242.952 270.74,243.029 R39.2@270.74,243.586
NetU2[1]_7: U2.7 U2[2].7 | length 1
  Top w0.254: U2.7@248.659,231.445 U2[2].7@249.635,231.445
NFC-FDN_XL-INT1: J11.3 J13.2 R7.1 R8.2 R13.1 TP3.P$1 U1.19 | length 122.7
  Top w0.127: v1(252.298,216.662) 252.781,217.145 252.781,223.825 v1(253.619,224.663) 253.619,225.4 253.365,225.654 253.365,226.064 252.781,226.649 252.781,228.905 253.213,229.337 253.797,229.337 254.076,229.616 v1(254.076,229.667) ; v1(267.081,233.324) 267.081,232.969 270.036,230.014 270.036,228.018 269.825,227.807 U1.19@269.47,227.807
  Top w0.152: J13.2@210.899,204.33 211.951,204.33 v1(212.242,204.038) ; v1(213.766,207.391) 213.893,207.391 214.071,207.569 214.071,209.206 216.586,211.72 216.586,215.367 v1(215.849,216.103) ; v1(224.739,216.256) 225.019,216.535 v1(225.781,216.535) 226.466,217.221 226.466,221.285 227.178,221.996 227.178,224.587 228.473,225.882 228.473,230.149 J11.3@226.873,231.75 ; R8.2@243.282,226.644 243.884,226.644 245.059,225.469 v1(245.059,224.942) 245.542,224.942 246.304,224.181 R13.1@246.304,224.029
  Top w0.305: R7.1@215.055,216.07 215.816,216.07 v1(215.849,216.103)
  Bottom w0.127: v1(225.781,216.535) 226.238,216.992 229.942,216.992 231.085,218.135 249.428,218.135 TP3.P$1@250.393,217.17 250.901,216.662 v1(252.298,216.662) ; v1(245.059,224.942) 245.448,225.331 251.892,225.331 252.56,224.663 v1(253.619,224.663) ; v1(254.076,229.667) 254.076,230.669 256.198,232.791 260.597,232.791 260.963,232.425 266.182,232.425 v1(267.081,233.324)
  Bottom w0.152: v1(212.242,204.038) 212.776,204.572 212.776,206.375 213.766,207.366 v1(213.766,207.391) ; v1@215.875,216.078 v1(215.849,216.103) 216.421,216.675 223.958,216.675 224.377,216.256 v1(224.739,216.256)
NFC_SCL: R12.2 U3.3 U3[1].3 | length 9.7
  Top w0.305: U3.3@210.288,215.046 210.482,214.853 U3[1].3@210.482,213.076 210.482,211.91 210.871,211.521 212.557,211.521 213.885,212.848 R12.2@213.885,215.206
NFC_SDA: R9.2 U3.5 U3[1].5 | length 5
  Top w0.305: U3.5@210.288,216.246 210.76,216.246 211.752,217.238 U3[1].5@211.752,217.279 ; U3[1].5@211.752,218.026 U3[1].5@211.752,217.279 ; R9.2@213.809,217.035 R9.2@213.885,216.959 212.072,216.959 U3[1].5@211.752,217.279
PTI_DFRAME: J1.9 U1.38 | length 27.6
  Top w0.127: v1(254.178,226.873) 254.178,228.956 258.709,233.487 258.709,237.332 257.378,238.663 J1.9@257.378,239.443 ; v1(263.474,225.196) 263.685,225.407 U1.38@264.47,225.407
  Bottom w0.127: v1(254.178,226.873) 254.178,226.387 256.47,224.094 262.703,224.094 263.474,224.865 v1(263.474,225.196) v1@263.393,225.115
PTI_DOUT: J1.10 U1.37 | length 31.6
  Top w0.127: v1(254.838,226.416) 254.838,226.949 254.432,227.355 254.432,228.85 258.963,233.382 258.963,241.595 258.343,242.214 257.861,242.214 257.378,242.697 J1.10@257.378,243.513 ; v1(262.763,224.815) 262.763,225.146 263.424,225.807 U1.37@264.47,225.807
  Bottom w0.127: v1(254.838,226.416) 254.838,226.085 256.576,224.348 262.296,224.348 v1(262.763,224.815)
RESET_TOUCHN: J13.3 R4.2 | length 85.6
  Top w0.127: J13.3@210.899,204.83 212.518,204.83 212.877,204.47 215.621,204.47 215.748,204.597 215.748,209.201 217.881,211.334 217.881,214.681 v1(218.211,215.011) ; v1(251.333,215.951) 251.323,215.961 251.323,218.684 252.019,219.38 252.019,221.792 250.866,222.945 250.866,224.124 251.459,224.717 251.459,230.639 252.755,231.935 v1(252.755,232.486) ; v1(260.807,235.255) 260.807,235.814 261.274,236.281 262.448,236.281 262.661,236.068 265.036,236.068 R4.2@265.392,236.423
  Bottom w0.127: v1(218.211,215.011) 218.58,215.379 222.929,215.379 223.488,214.82 225.921,214.82 227.839,216.738 230.047,216.738 231.19,217.881 249.047,217.881 249.352,217.576 249.352,216.891 250.292,215.951 v1(251.333,215.951) ; v1(252.755,232.486) 253.351,232.486 255.433,234.569 260.651,234.569 260.807,234.725 v1(260.807,235.255)
RESETN: C6.2 J1.3 SW2.1 SW2.2 U1.11 | length 50
  Top w0.127: v1(251.587,223.825) 252.019,224.257 252.019,230.48 253.543,232.004 v1(253.543,237.795) ; U1.11@269.47,224.607 269.57,224.507 v1(269.57,224.072)
  Top w0.254: SW2.2@244.026,242.46 SW2.1@248.176,242.46 248.181,242.454 C6.2@248.181,241.503 248.181,240.87 v1(248.183,240.868) ; v1(253.543,237.795) 253.568,237.82 J1.3@253.568,239.443
  Bottom w0.127: v1(248.183,240.868) 250.469,240.868 v1(253.543,237.795) ; v1(251.587,223.825) 251.587,223.596 252.044,223.139 252.995,223.139 255.179,220.955 261.01,220.955 262.433,222.377 266.903,222.377 267.284,222.758 268.256,222.758 v1(269.57,224.072) v1@269.57,224.047
RFVDD: C7.2 C8.1 L1.2 L1[2].2 L2.1 L2[1].1 R1.1 R2.1 TP1.P$1 U1.34 | length 65.3
  Top w0.152: L1.2@261.188,230.346 L1[2].2@261.531,230.346
  Top w0.203: v1(262.788,228.136) 262.865,228.136 263.323,227.678 C8.1@263.323,227.476 263.323,227.399 263.714,227.007 U1.34@264.47,227.007
  Top w0.22: R2.1@274.473,229.889 v1(275.082,229.889)
  Top w0.254: v1(257.477,217.396) 257.477,229.207 v1(258.877,230.607) ; C7.2@259.639,230.601 260.933,230.601 L1.2@261.188,230.346 ; R2.1@274.473,229.889 R1.1@274.473,230.454
  Top w0.305: v1(258.877,230.607) 259.633,230.607 C7.2@259.639,230.601 ; v1(271.907,217.396) 271.907,219.933 273.025,221.05 L2.1@273.025,222.44 L2[1].1@273.025,222.63
  Bottom w0.254: v1(257.477,217.396) 258.008,216.865 TP1.P$1@258.369,216.865 271.376,216.865 v1(271.907,217.396) ; v1@262.788,228.183 v1(262.788,228.136) 263.294,228.642 263.294,229.606 263.134,229.766 259.717,229.766 v1(258.877,230.607) 260.375,232.105 266.573,232.105 267.053,232.585 268.963,232.585 271.274,230.274 272.875,230.274 273.276,229.872 275.065,229.872 v1(275.082,229.889)
SIO2: C19.2 J2.2 R17.1 R18.2 U2.3 U2.8 U2[2].3 U2[2].8 | length 18.4
  Top w0.127: U2[2].3@242.465,230.175 U2.3@243.389,230.175
  Top w0.254: R18.2@240.944,232.206 240.944,230.202 C19.2@240.97,230.177 242.463,230.177 U2[2].3@242.465,230.175 ; U2.8@248.659,232.715 U2[2].8@249.635,232.715
  Top w0.305: R17.1@239.56,235.458 239.547,235.445 239.547,232.664 240.006,232.206 R18.2@240.944,232.206 ; U2.3@243.389,230.175 244.856,230.175 247.396,232.715 U2.8@248.659,232.715
  Top w0.508: R17.1@239.56,235.458 239.56,236.969 J2.2@240.081,237.49
VBAT: BATT1.1 BATT2.1 J10.1 | length 62.6
  Top w0.635: J10.1@229.87,244.17 230.556,243.484 230.556,226.06 233.868,222.748 233.868,211.491 v1(233.858,211.48) v1(233.858,210.795) ; BATT2.1@252.374,206.172 v1(252.374,209.474) v1(252.374,210.134)
  Top w2.54: BATT2.1@252.374,206.172 v1(254.813,206.172) BATT1.1@255.818,206.172
  Bottom w0.635: v1(233.858,211.48) v1(233.858,210.795) 234.518,210.134 v1(252.374,210.134) v1(252.374,209.474)
  other v1: 256.819,204.572 253.06,204.597 251.536,204.622 254.914,204.673 256.794,206.172 251.485,206.197 253.035,206.223 251.435,207.518 253.035,207.569 254.965,207.696 256.718,207.696
VBOOST_LED: C33.2 J8.1 R22.2 R40.2 U5.9 | length 6.2
  Top w0.203: U5.9@269.549,242.189 270.33,242.189 270.583,242.442 R40.2@270.662,242.442 271.398,242.442 C33.2@271.678,242.722
  Top w0.508: C33.2@271.666,242.697 R22.2@272.974,242.697 274.168,242.697 J8.1@275.107,243.637
VCC: C1.1 C2.2 C3.1 C4.2 C5.1 C21.2 C21[2].2 C22.2 C22[2].2 C23.2 C24.2 C24[2].2 C25.2 C25[2].2 D2.C J1.1 J2.1 J3.1 J4.2 J5.1 J6.1 J8.3 J9.2 J10.2 J11.2 R1.2 R16.2 R17.2 R19.2 R23.2 R30.2 R33.2 R35.2 R36.2 U1.32 U1.35 U1.36 | length 202.9
  Top w0.203: U1.36@264.47,226.207 263.27,226.207 263.016,226.461 C5.1@262.23,226.461 ; U1.35@264.47,226.607 263.48,226.607 263.12,226.967 C3.1@262.23,226.967 C5.1@262.23,226.461 ; U1.32@264.47,227.807 263.88,227.807 263.538,228.149 C1.1@263.538,228.389 263.323,228.389 263.017,228.695 261.798,228.695 261.527,228.425 260.301,228.425 C2.2@260.198,228.321 261.01,227.509 261.01,226.721 C4.2@261.367,226.365 261.463,226.461 C5.1@262.23,226.461
  Top w0.254: v1(259.461,235.204) 259.461,236.231 260.299,237.069 260.299,241.719 R36.2@260.515,241.935 ; v1(268.453,233.553) v1(268.453,238.379) ; v1(273.38,230.607) 273.533,230.454 R1.2@273.963,230.454
  Top w0.305: v1(242.595,237.592) 242.626,237.561 D2.C@243.51,237.561 244.291,237.561 C23.2@244.475,237.745 ; v1(255.016,227.863) 255.016,228.95 259.41,233.344 259.41,235.153 v1(259.461,235.204) ; v1(259.207,227.863) 259.665,228.321 C2.2@260.198,228.321
  Top w0.508: R19.2@211.018,241.953 211.018,243.642 J3.1@211.437,244.061 ; R35.2@215.1,205.461 215.1,209.182 217.335,211.417 217.335,215.582 v1(217.576,215.824) ; R33.2@216.759,241.953 216.759,243.769 J4.2@217.051,244.061 ; v1(226.822,216.383) 229.006,218.567 229.006,232.156 J11.2@226.873,234.29 ; J5.1@232.867,244.17 233.489,243.548 R30.2@233.489,242.062 ; R16.2@235.483,232.194 237.071,232.194 J9.2@237.515,232.639 237.96,233.083 R17.2@237.96,235.458 237.96,237.071 J2.1@237.541,237.49 ; C23.2@244.475,237.745 246.457,237.745 C24[2].2@246.482,237.769 ; C25[2].2@248.768,237.769 249.123,237.414 v1(251.46,237.414) 251.841,237.414 252.298,237.871 J1.1@252.298,239.443 ; J6.1@260.502,244.145 260.515,244.132 R36.2@260.515,241.935 ; R23.2@272.771,239.484 R23.2@272.974,239.484 274.18,239.484 J8.3@275.107,238.557
  Top w0.635: C22.2@226.644,239.446 C22[2].2@226.746,239.446 C22.2@227.203,239.446 227.305,239.446 227.838,239.446 228.803,238.481 228.803,236.22 J11.2@226.873,234.29 ; C21[2].2@226.746,241.605 227.33,242.189 J10.2@227.33,244.17
  Top w1.27: C22.2@227.305,239.446 C21.2@227.305,241.605 ; C24[2].2@246.482,237.769 C25[2].2@248.768,237.769
  Bottom w0.254: v1(268.453,233.553) 268.679,233.327 269.517,233.327 270.637,232.207 271.145,232.207 271.447,231.904 271.447,231.092 271.884,230.655 273.332,230.655 v1(273.38,230.607)
  Bottom w0.305: v1(251.46,237.414) 252.832,236.042 258.623,236.042 v1(259.461,235.204) ; v1(255.016,227.863) v1(259.207,227.863)
  Bottom w0.508: J3.1@211.437,244.061 212.618,242.88 215.87,242.88 217.051,244.061 217.051,239.32 219.999,236.372 223.866,236.372 225.949,234.29 J11.2@226.873,234.29 ; v1(217.576,215.824) 223.114,215.824 223.672,215.265 225.704,215.265 v1(226.822,216.383) ; J10.2@227.33,244.17 228.511,242.989 231.686,242.989 J5.1@232.867,244.17 237.541,239.497 ; J2.1@237.541,237.49 237.541,239.497 ; v1(242.595,237.592) 240.69,239.497 239.852,239.497 239.829,239.474 237.564,239.474 237.541,239.497 ; J6.1@260.502,244.145 260.502,242.722 261.084,242.141 263.564,242.141 265.855,239.85 266.982,239.85 v1(268.453,238.379) 274.93,238.379 J8.3@275.107,238.557
VDD_LED: D1.4 J8.2 R22.1 R23.1 | length 18
  Top w0.305: R22.1@272.771,241.084 R22.1@272.771,241.097
  Top w0.508: R22.1@272.771,241.097 R22.1@272.974,241.097 J8.2@275.107,241.097
  Bottom w0.305: J8.2@275.107,241.097 275.209,241.097 276.758,242.646 278.815,242.646 280.33,244.161 288.186,244.161 288.751,243.596 D1.4@289.225,243.596
VEXT: J7.2 J10.3 | length 5.7
  Bottom w0.635: J7.2@221.107,241.427 221.107,242.824 222.468,244.185 224.775,244.185 J10.3@224.79,244.17
pads on no net: J12.1 J12.4 J12.6 J12.7 J12.19 J13.P$5 J13.P$6 M1.1 M2.1 M3.1 M4.1 U4.4 U4.6 U4.11 U5.1

## Polygon pours and split planes (outlines as drawn)
GND on Bottom "Bottom-GND" (solid, pour order 6): 280.06,207.162 291.008,207.162 291.008,204.902 280.111,204.902 280.06,204.953
GND on Bottom "Bottom-GND" (solid, remove dead copper, pour order 2): 205.308,193.904 281.661,193.904 281.661,242.722 285.115,242.722 291.287,242.722 291.287,245.974 205.308,245.974
GND on Top "Top-GND" (solid, pour order 4): 280.06,207.162 289.408,207.162 289.408,204.902 280.06,204.902
GND on Top "Top-GND" (solid, remove dead copper, pour order 0): 205.308,193.904 281.661,193.904 281.661,242.722 285.191,242.722 291.287,242.722 291.287,245.974 259.49,245.974 205.308,245.974